# EAGLE board ProgrammerConverterNonShrouded (EAGLE 6.4)
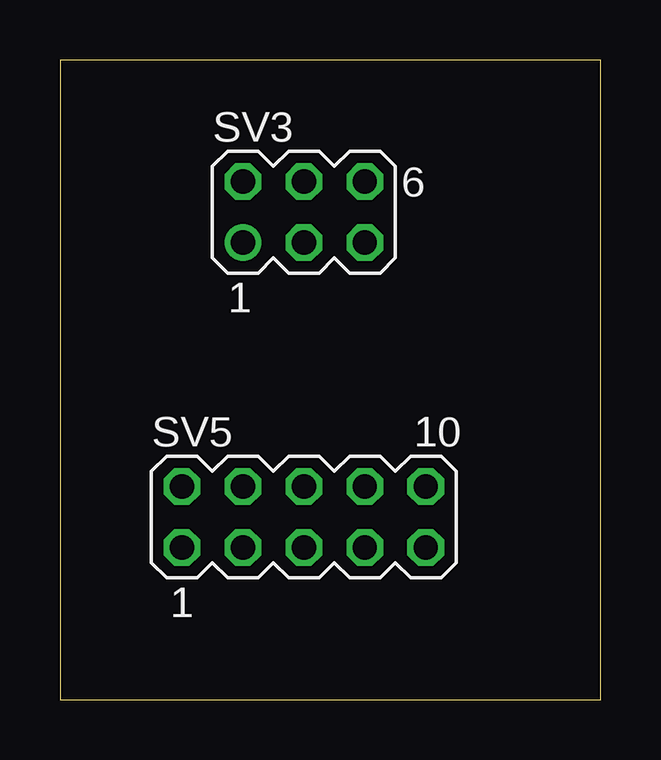
[diagram p0: board, top side]
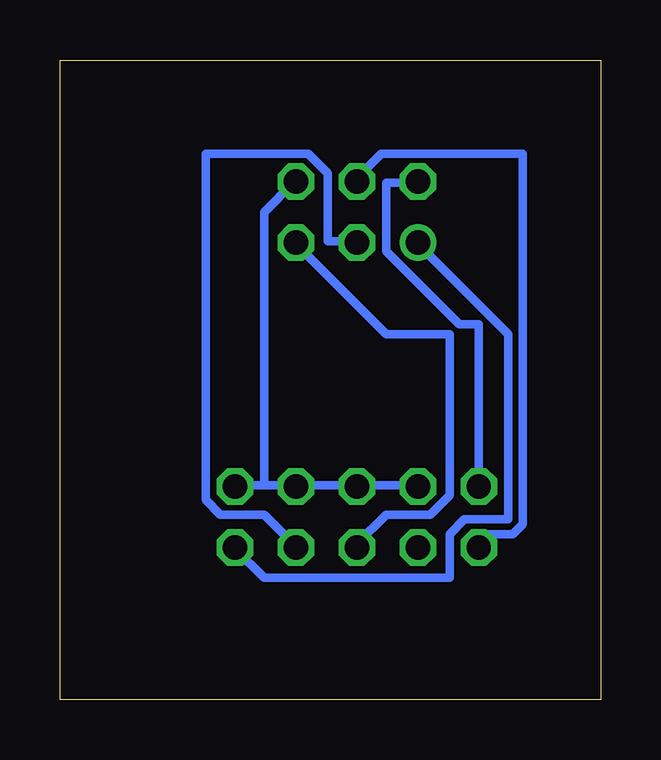
[diagram p1: board, bottom side, seen from below]

Size 22.53 x 26.66 mm. Coordinates in mm from the lower left corner, seen from the top.
Outline: 0,0 22.53,0 22.53,26.66 0,26.66 0,0
Copper layers (1*16): Top 0.035mm / dielectric 1.5mm / Bottom 0.035mm
Design rules "default *": minimum track width 14mil, minimum drill 24mil, track to track 8mil, track to pad 8mil, pad to pad 8mil, via to via 8mil, smd to smd 8mil, copper to edge 40mil, drill to drill 8mil, minimum pad ring 10mil, minimum via ring 8mil, stop-mask expansion 4mil, vias tented up to drill 0mil, thermal gap 10mil

## Footprints (pad centres in the part's own frame; a part is rotated, then mirrored left to right if it is on the bottom)
MA03-2 = drill 1.016: 1 -2.54,-1.27 | drill 1.016 octagon: 2 -2.54,1.27; 3 0,-1.27; 4 0,1.27; 5 2.54,-1.27; 6 2.54,1.27
MA05-2 = drill 1.016 octagon: 1 -5.08,-1.27; 2 -5.08,1.27; 3 -2.54,-1.27; 4 -2.54,1.27; 5 0,-1.27; 6 0,1.27; 7 2.54,-1.27; 8 2.54,1.27; 9 5.08,-1.27; 10 5.08,1.27

## Placement (x,y rotation side)
SV3  ICSP  [MA03-2]  10.16,20.32 0 top
SV5  USBASP  [MA05-2]  10.16,7.62 0 top

## Library data of the parts
SV3 SV5 = con-lstb; OC_FARNELL: unknown; OC_NEWARK: unknown

## Nets
D11/MOSI: SV3.4 SV5.1
D12/MISO: SV3.1 SV5.9
D13/SCK: SV3.3 SV5.7
GND: SV3.6 SV5.4 SV5.6 SV5.8 SV5.10
NC: SV5.3
RESET: SV3.5 SV5.5
VCC: SV3.2 SV5.2

## Tracks (layer width: path | path; a pad name or v marks a point on that pad's centre or on a via)
D11/MOSI
  Bottom 0.356: SV5.1 5.08,6.5 4.67,6.91 3.66,6.91 3.25,7.32 3.25,22.76 9.14,22.76 10.16,21.74 SV3.4
D12/MISO
  Bottom 0.356: SV3.1 7.52,18.9 3.86,15.24 3.86,7.52 5.69,7.52 6.3,6.91 6.3,5.08 14.02,5.08 15.24,6.3 SV5.9
D13/SCK
  Bottom 0.356: SV5.7 12.8,6.5 14.02,7.72 15.85,7.72 16.46,8.33 16.46,22.76 12.19,22.76 11.38,21.95 11.38,19.1 10.16,19.1 SV3.3
GND
  Bottom 0.356: 10.16,8.94 7.72,8.94 SV5.4 | 14.02,8.94 15.24,8.94 SV5.10 | 14.02,8.94 12.8,8.94 SV5.8 12.6,8.94 10.16,8.94 | 14.02,8.94 14.02,20.32 12.8,21.54 SV3.6 | 10.16,8.94 SV5.6
RESET
  Bottom 0.356: SV5.5 10.16,6.5 8.94,7.72 7.11,7.72 6.3,8.53 6.3,15.24 8.94,15.24 12.6,18.9 SV3.5
VCC
  Bottom 0.356: SV5.2 5.08,15.65 5.89,15.65 8.94,18.69 8.94,21.54 7.72,21.54 SV3.2